# EAGLE board AS726x Spectral Sensor Panel-NoGaps (EAGLE 7.7.0), part 1 of 2
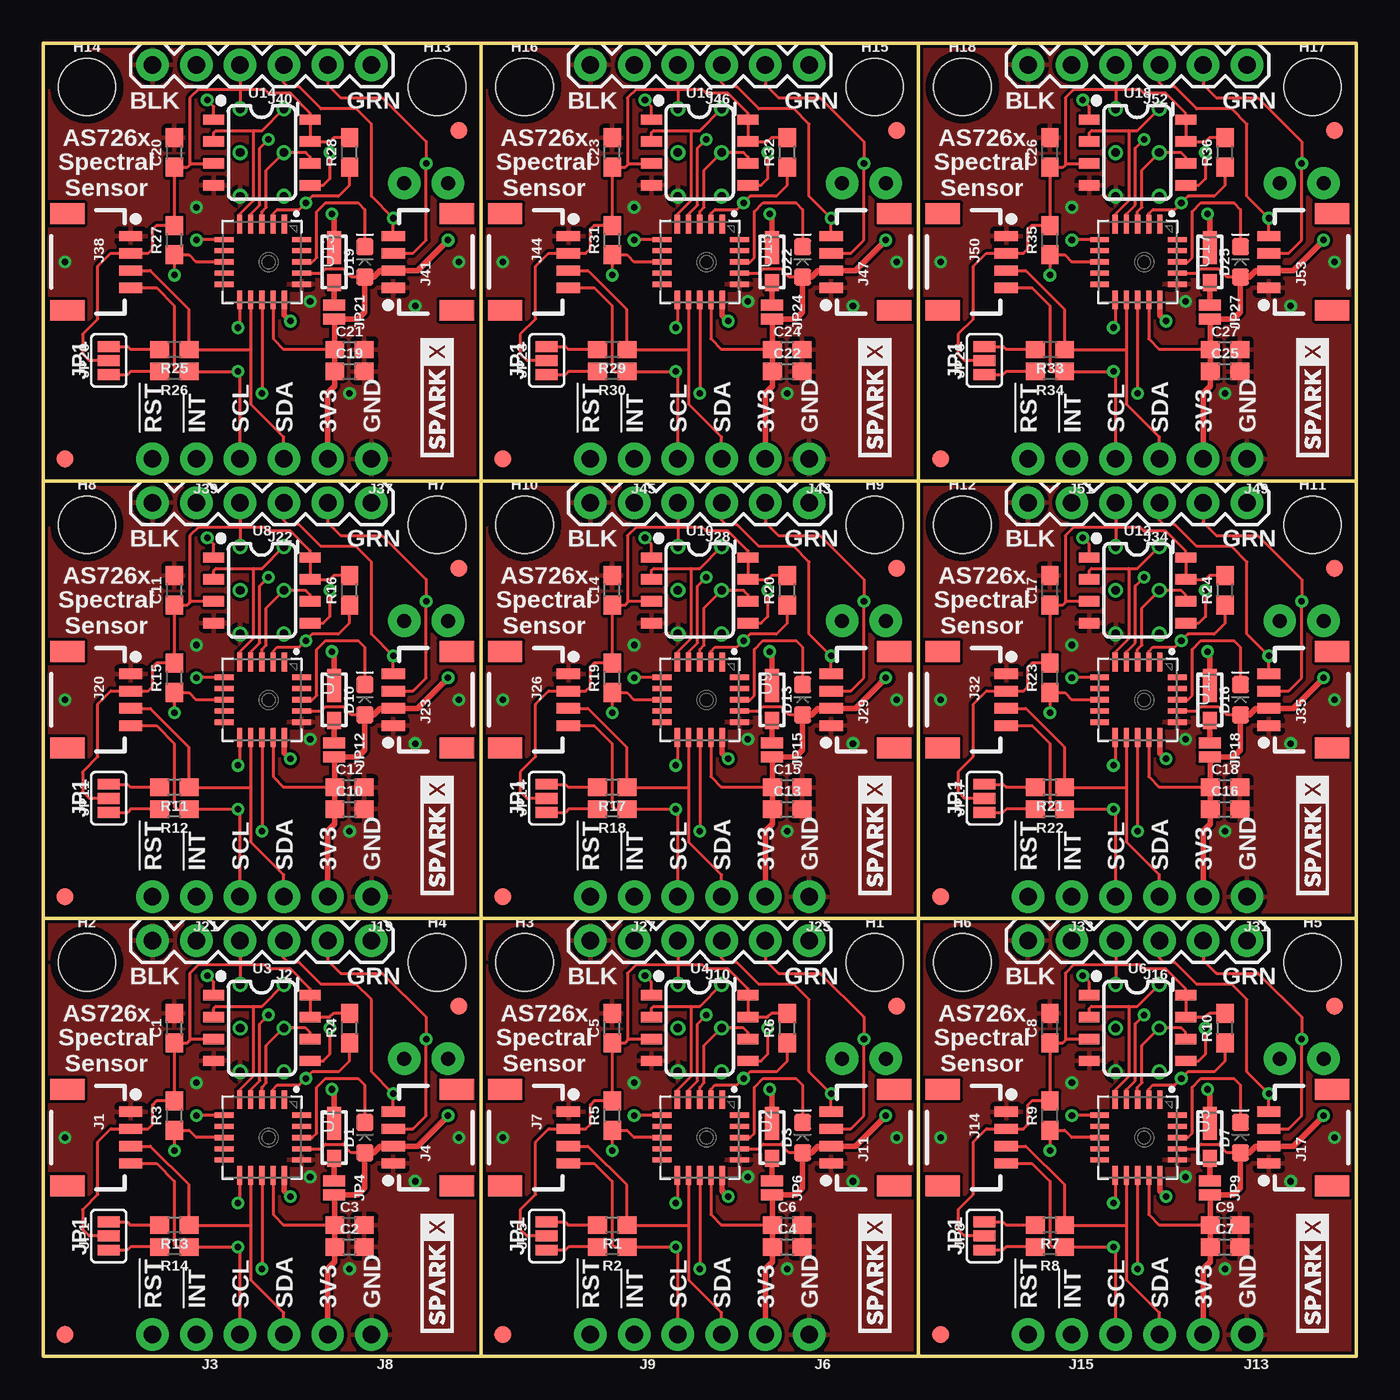
[diagram p0: board, top side]
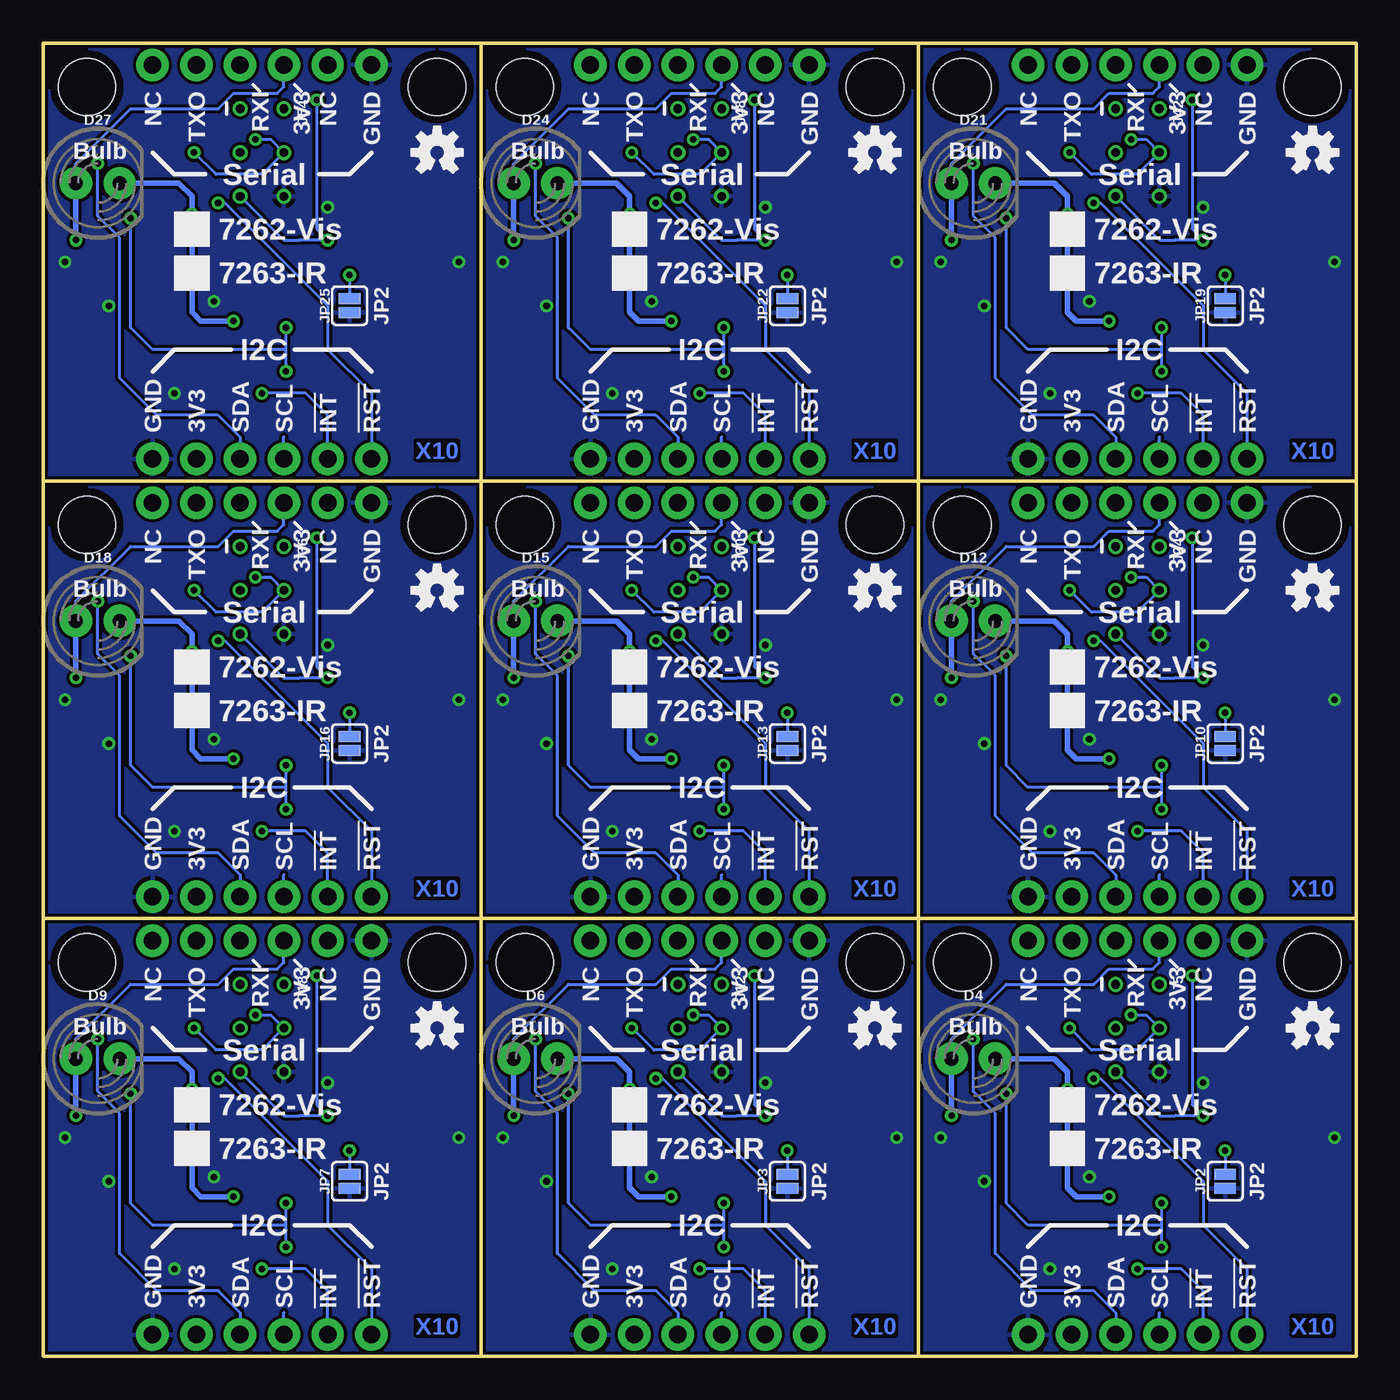
[diagram p1: board, bottom side, seen from below]

Size 76.2 x 76.2 mm. Coordinates in mm from the lower left corner, seen from the top.
Outline: 0,25.4 0,0 25.4,0
Outline: 0,25.4 25.4,25.4
Outline: 25.4,25.4 25.4,0
Outline: 25.4,0 25.4,25.4
Outline: 25.4,25.4 50.8,25.4
Outline: 50.8,25.4 50.8,0
Outline: 50.8,0 25.4,0
Outline: 50.8,0 50.8,25.4
Outline: 50.8,25.4 76.2,25.4
Outline: 76.2,25.4 76.2,0 50.8,0
Outline: 0,25.4 0,50.8
Outline: 0,50.8 25.4,50.8
Outline: 25.4,50.8 25.4,25.4
Outline: 25.4,25.4 0,25.4
Outline: 25.4,25.4 25.4,50.8
Outline: 25.4,50.8 50.8,50.8
Outline: 50.8,50.8 50.8,25.4
Outline: 50.8,25.4 25.4,25.4
Outline: 50.8,25.4 50.8,50.8
Outline: 50.8,50.8 76.2,50.8
Outline: 76.2,50.8 76.2,25.4
Outline: 76.2,25.4 50.8,25.4
Outline: 0,50.8 0,76.2 25.4,76.2
Outline: 25.4,76.2 25.4,50.8
Outline: 25.4,50.8 0,50.8
Outline: 25.4,50.8 25.4,76.2
Outline: 25.4,76.2 50.8,76.2
Outline: 50.8,76.2 50.8,50.8
Outline: 50.8,50.8 25.4,50.8
Outline: 50.8,50.8 50.8,76.2
Outline: 50.8,76.2 76.2,76.2 76.2,50.8
Outline: 76.2,50.8 50.8,50.8
Copper layers (1*16): Top 0.035mm / dielectric 1.5mm / Bottom 0.035mm
Design rules "SparkFun-2-layer-TIGHT": minimum track width 7mil, minimum drill 15mil, track to track 7mil, track to pad 7mil, pad to pad 7mil, via to via 7mil, smd to smd 7mil, copper to edge 7mil, drill to drill 7mil, minimum pad ring 7mil, minimum via ring 7mil, stop-mask expansion 4mil, vias tented up to drill 25mil, thermal gap 10mil

## Footprints (pad centres in the part's own frame; a part is rotated, then mirrored left to right if it is on the bottom)
0603 = smd 1.1 x 1: 1 -0.85,0; 2 0.85,0
LED-0603 = smd 1 x 1: A -0.877,0; C 0.877,0
SUPER_BRIGHT_SMD_LED_1206 = smd 1 x 0.8: A -1.2,0 | smd 1.9 x 0.8: C 0.827,0
LED_5MM_NOSILK = drill 0.813 pad 1.88: A -1.27,0; K 1.27,0
FIDUCIAL-1X2 = smd 1 x 1: 1 0,0
STAND-OFF = hole 3.302: 0,0
1X04_1MM_RA = smd 0.6 x 1.35: 1 -1.5,0; 2 -0.5,0; 3 0.5,0; 4 1.5,0 | smd 1.2 x 2: NC1 2.8,-3.675; NC2 -2.8,-3.675
FTDI_BASIC = drill 1.016 pad 1.88: CTS 10.16,0; DTR 0,0; GND 12.7,0; RXI 2.54,0; TXO 5.08,0; VCC 7.62,0
1X02_NO_SILK = drill 1.016 pad 1.88: 1 0,0; 2 2.54,0
2X3_TEST_POINTS = drill 0.508: 1 -2.54,-1.27; 2 -2.54,1.27; 3 0,-1.27; 4 0,1.27; 5 2.54,-1.27; 6 2.54,1.27
1X04_NO_SILK = drill 1.016 pad 1.88: 1 0,0; 2 2.54,0; 3 5.08,0; 4 7.62,0
SMT-JUMPER_3_2-NC_PASTE_SILK = smd 0.635 x 1.27: 1 -0.813,0; 2 0,0; 3 0.813,0
SMT-JUMPER_2_NO_SILK = smd 0.635 x 1.27: 1 -0.406,0; 2 0.406,0
SMT-JUMPER_2_NC_PASTE_NO-SILK = smd 0.635 x 1.27: 1 -0.406,0; 2 0.406,0
LGA20 = smd 1.1 x 0.3: 1 -2.2,1.3; 2 -2.2,0.65; 3 -2.2,0; 4 -2.2,-0.65; 5 -2.2,-1.3; 11 2.2,-1.3; 12 2.2,-0.65; 13 2.2,0; 14 2.2,0.65; 15 2.2,1.3 | smd 0.3 x 1.1: 6 -1.3,-2.2; 7 -0.65,-2.2; 8 0,-2.2; 9 0.65,-2.2; 10 1.3,-2.2; 16 1.3,2.3; 17 0.65,2.3; 18 0,2.3; 19 -0.65,2.3; 20 -1.3,2.3
SO08 = smd 0.6 x 1.2: 1 -1.905,-2.8; 2 -0.635,-2.8; 3 0.635,-2.8; 4 1.905,-2.8; 5 1.905,2.8; 6 0.635,2.8; 7 -0.635,2.8; 8 -1.905,2.8

## Placement (x,y rotation side)
C1  1.0uF  [0603]  7.62,19.05 90 top
C2  1.0uF  [0603]  17.78,6.35 0 top
C3  10uF  [0603]  17.78,7.62 0 top
C4  1.0uF  [0603]  43.18,6.35 0 top
C5  1.0uF  [0603]  33.02,19.05 90 top
C6  10uF  [0603]  43.18,7.62 0 top
C7  1.0uF  [0603]  68.58,6.35 0 top
C8  1.0uF  [0603]  58.42,19.05 90 top
C9  10uF  [0603]  68.58,7.62 0 top
C10  1.0uF  [0603]  17.78,31.75 0 top
C11  1.0uF  [0603]  7.62,44.45 90 top
C12  10uF  [0603]  17.78,33.02 0 top
C13  1.0uF  [0603]  43.18,31.75 0 top
C14  1.0uF  [0603]  33.02,44.45 90 top
C15  10uF  [0603]  43.18,33.02 0 top
C16  1.0uF  [0603]  68.58,31.75 0 top
C17  1.0uF  [0603]  58.42,44.45 90 top
C18  10uF  [0603]  68.58,33.02 0 top
C19  1.0uF  [0603]  17.78,57.15 0 top
C20  1.0uF  [0603]  7.62,69.85 90 top
C21  10uF  [0603]  17.78,58.42 0 top
C22  1.0uF  [0603]  43.18,57.15 0 top
C23  1.0uF  [0603]  33.02,69.85 90 top
C24  10uF  [0603]  43.18,58.42 0 top
C25  1.0uF  [0603]  68.58,57.15 0 top
C26  1.0uF  [0603]  58.42,69.85 90 top
C27  10uF  [0603]  68.58,58.42 0 top
D1  BLUE  [LED-0603]  18.67,12.7 90 top
D2  5700k  [SUPER_BRIGHT_SMD_LED_1206]  16.89,12.7 90 top
D3  BLUE  [LED-0603]  44.07,12.7 90 top
D4  Incandescent  [LED_5MM_NOSILK]  22.23,17.27 0 bottom
D5  5700k  [SUPER_BRIGHT_SMD_LED_1206]  42.29,12.7 90 top
D6  Incandescent  [LED_5MM_NOSILK]  47.62,17.27 0 bottom
D7  BLUE  [LED-0603]  69.47,12.7 90 top
D8  5700k  [SUPER_BRIGHT_SMD_LED_1206]  67.69,12.7 90 top
D9  Incandescent  [LED_5MM_NOSILK]  73.03,17.27 0 bottom
D10  BLUE  [LED-0603]  18.67,38.1 90 top
D11  5700k  [SUPER_BRIGHT_SMD_LED_1206]  16.89,38.1 90 top
D12  Incandescent  [LED_5MM_NOSILK]  22.23,42.67 0 bottom
D13  BLUE  [LED-0603]  44.07,38.1 90 top
D14  5700k  [SUPER_BRIGHT_SMD_LED_1206]  42.29,38.1 90 top
D15  Incandescent  [LED_5MM_NOSILK]  47.62,42.67 0 bottom
D16  BLUE  [LED-0603]  69.47,38.1 90 top
D17  5700k  [SUPER_BRIGHT_SMD_LED_1206]  67.69,38.1 90 top
D18  Incandescent  [LED_5MM_NOSILK]  73.03,42.67 0 bottom
D19  BLUE  [LED-0603]  18.67,63.5 90 top
D20  5700k  [SUPER_BRIGHT_SMD_LED_1206]  16.89,63.5 90 top
D21  Incandescent  [LED_5MM_NOSILK]  22.23,68.07 0 bottom
D22  BLUE  [LED-0603]  44.07,63.5 90 top
D23  5700k  [SUPER_BRIGHT_SMD_LED_1206]  42.29,63.5 90 top
D24  Incandescent  [LED_5MM_NOSILK]  47.62,68.07 0 bottom
D25  BLUE  [LED-0603]  69.47,63.5 90 top
D26  5700k  [SUPER_BRIGHT_SMD_LED_1206]  67.69,63.5 90 top
D27  Incandescent  [LED_5MM_NOSILK]  73.03,68.07 0 bottom
FD1  FIDUCIAL1X2  [FIDUCIAL-1X2]  1.27,1.27 0 top
FD2  FIDUCIAL1X2  [FIDUCIAL-1X2]  24.13,20.32 0 top
FD3  FIDUCIAL1X2  [FIDUCIAL-1X2]  26.67,1.27 0 top
FD4  FIDUCIAL1X2  [FIDUCIAL-1X2]  49.53,20.32 0 top
FD5  FIDUCIAL1X2  [FIDUCIAL-1X2]  52.07,1.27 0 top
FD6  FIDUCIAL1X2  [FIDUCIAL-1X2]  74.93,20.32 0 top
FD7  FIDUCIAL1X2  [FIDUCIAL-1X2]  1.27,26.67 0 top
FD8  FIDUCIAL1X2  [FIDUCIAL-1X2]  24.13,45.72 0 top
FD9  FIDUCIAL1X2  [FIDUCIAL-1X2]  26.67,26.67 0 top
FD10  FIDUCIAL1X2  [FIDUCIAL-1X2]  49.53,45.72 0 top
FD11  FIDUCIAL1X2  [FIDUCIAL-1X2]  52.07,26.67 0 top
FD12  FIDUCIAL1X2  [FIDUCIAL-1X2]  74.93,45.72 0 top
FD13  FIDUCIAL1X2  [FIDUCIAL-1X2]  1.27,52.07 0 top
FD14  FIDUCIAL1X2  [FIDUCIAL-1X2]  24.13,71.12 0 top
FD15  FIDUCIAL1X2  [FIDUCIAL-1X2]  26.67,52.07 0 top
FD16  FIDUCIAL1X2  [FIDUCIAL-1X2]  49.53,71.12 0 top
FD17  FIDUCIAL1X2  [FIDUCIAL-1X2]  52.07,52.07 0 top
FD18  FIDUCIAL1X2  [FIDUCIAL-1X2]  74.93,71.12 0 top
H1  STAND-OFF  [STAND-OFF]  48.26,22.86 0 top
H2  STAND-OFF  [STAND-OFF]  2.54,22.86 0 top
H3  STAND-OFF  [STAND-OFF]  27.94,22.86 0 top
H4  STAND-OFF  [STAND-OFF]  22.86,22.86 0 top
H5  STAND-OFF  [STAND-OFF]  73.66,22.86 0 top
H6  STAND-OFF  [STAND-OFF]  53.34,22.86 0 top
H7  STAND-OFF  [STAND-OFF]  22.86,48.26 0 top
H8  STAND-OFF  [STAND-OFF]  2.54,48.26 0 top
H9  STAND-OFF  [STAND-OFF]  48.26,48.26 0 top
H10  STAND-OFF  [STAND-OFF]  27.94,48.26 0 top
H11  STAND-OFF  [STAND-OFF]  73.66,48.26 0 top
H12  STAND-OFF  [STAND-OFF]  53.34,48.26 0 top
H13  STAND-OFF  [STAND-OFF]  22.86,73.66 0 top
H14  STAND-OFF  [STAND-OFF]  2.54,73.66 0 top
H15  STAND-OFF  [STAND-OFF]  48.26,73.66 0 top
H16  STAND-OFF  [STAND-OFF]  27.94,73.66 0 top
H17  STAND-OFF  [STAND-OFF]  73.66,73.66 0 top
H18  STAND-OFF  [STAND-OFF]  53.34,73.66 0 top
J1  [1X04_1MM_RA]  5.08,12.7 270 top
J2  Serial Interface  [FTDI_BASIC]  19.05,24.13 180 top
J3  [1X02_NO_SILK]  8.89,1.27 180 top
J4  [1X04_1MM_RA]  20.32,12.7 90 top
J5  Flash Programming  [2X3_TEST_POINTS]  12.7,19.05 270 bottom
J6  [1X04_NO_SILK]  44.45,1.27 180 top
J7  [1X04_1MM_RA]  30.48,12.7 270 top
J8  [1X04_NO_SILK]  19.05,1.27 180 top
J9  [1X02_NO_SILK]  34.29,1.27 180 top
J10  Serial Interface  [FTDI_BASIC]  44.45,24.13 180 top
J11  [1X04_1MM_RA]  45.72,12.7 90 top
J12  Flash Programming  [2X3_TEST_POINTS]  38.1,19.05 270 bottom
J13  [1X04_NO_SILK]  69.85,1.27 180 top
J14  [1X04_1MM_RA]  55.88,12.7 270 top
J15  [1X02_NO_SILK]  59.69,1.27 180 top
J16  Serial Interface  [FTDI_BASIC]  69.85,24.13 180 top
J17  [1X04_1MM_RA]  71.12,12.7 90 top
J18  Flash Programming  [2X3_TEST_POINTS]  63.5,19.05 270 bottom
J19  [1X04_NO_SILK]  19.05,26.67 180 top
J20  [1X04_1MM_RA]  5.08,38.1 270 top
J21  [1X02_NO_SILK]  8.89,26.67 180 top
J22  Serial Interface  [FTDI_BASIC]  19.05,49.53 180 top
J23  [1X04_1MM_RA]  20.32,38.1 90 top
J24  Flash Programming  [2X3_TEST_POINTS]  12.7,44.45 270 bottom
J25  [1X04_NO_SILK]  44.45,26.67 180 top
J26  [1X04_1MM_RA]  30.48,38.1 270 top
J27  [1X02_NO_SILK]  34.29,26.67 180 top
J28  Serial Interface  [FTDI_BASIC]  44.45,49.53 180 top
J29  [1X04_1MM_RA]  45.72,38.1 90 top
J30  Flash Programming  [2X3_TEST_POINTS]  38.1,44.45 270 bottom
J31  [1X04_NO_SILK]  69.85,26.67 180 top
J32  [1X04_1MM_RA]  55.88,38.1 270 top
J33  [1X02_NO_SILK]  59.69,26.67 180 top
J34  Serial Interface  [FTDI_BASIC]  69.85,49.53 180 top
J35  [1X04_1MM_RA]  71.12,38.1 90 top
J36  Flash Programming  [2X3_TEST_POINTS]  63.5,44.45 270 bottom
J37  [1X04_NO_SILK]  19.05,52.07 180 top
J38  [1X04_1MM_RA]  5.08,63.5 270 top
J39  [1X02_NO_SILK]  8.89,52.07 180 top
J40  Serial Interface  [FTDI_BASIC]  19.05,74.93 180 top
J41  [1X04_1MM_RA]  20.32,63.5 90 top
J42  Flash Programming  [2X3_TEST_POINTS]  12.7,69.85 270 bottom
J43  [1X04_NO_SILK]  44.45,52.07 180 top
J44  [1X04_1MM_RA]  30.48,63.5 270 top
J45  [1X02_NO_SILK]  34.29,52.07 180 top
J46  Serial Interface  [FTDI_BASIC]  44.45,74.93 180 top
J47  [1X04_1MM_RA]  45.72,63.5 90 top
J48  Flash Programming  [2X3_TEST_POINTS]  38.1,69.85 270 bottom
J49  [1X04_NO_SILK]  69.85,52.07 180 top
J50  [1X04_1MM_RA]  55.88,63.5 270 top
J51  [1X02_NO_SILK]  59.69,52.07 180 top
J52  Serial Interface  [FTDI_BASIC]  69.85,74.93 180 top
J53  [1X04_1MM_RA]  71.12,63.5 90 top
J54  Flash Programming  [2X3_TEST_POINTS]  63.5,69.85 270 bottom
JP1  [SMT-JUMPER_3_2-NC_PASTE_SILK]  3.81,6.99 90 top
JP2  [SMT-JUMPER_2_NO_SILK]  7.62,10.16 90 bottom
JP3  [SMT-JUMPER_2_NO_SILK]  33.02,10.16 90 bottom
JP4  [SMT-JUMPER_2_NC_PASTE_NO-SILK]  16.89,9.78 270 top
JP5  [SMT-JUMPER_3_2-NC_PASTE_SILK]  29.21,6.99 90 top
JP6  [SMT-JUMPER_2_NC_PASTE_NO-SILK]  42.29,9.78 270 top
JP7  [SMT-JUMPER_2_NO_SILK]  58.42,10.16 90 bottom
JP8  [SMT-JUMPER_3_2-NC_PASTE_SILK]  54.61,6.99 90 top
JP9  [SMT-JUMPER_2_NC_PASTE_NO-SILK]  67.69,9.78 270 top
JP10  [SMT-JUMPER_2_NO_SILK]  7.62,35.56 90 bottom
JP11  [SMT-JUMPER_3_2-NC_PASTE_SILK]  3.81,32.38 90 top
JP12  [SMT-JUMPER_2_NC_PASTE_NO-SILK]  16.89,35.18 270 top
JP13  [SMT-JUMPER_2_NO_SILK]  33.02,35.56 90 bottom
JP14  [SMT-JUMPER_3_2-NC_PASTE_SILK]  29.21,32.38 90 top
JP15  [SMT-JUMPER_2_NC_PASTE_NO-SILK]  42.29,35.18 270 top
JP16  [SMT-JUMPER_2_NO_SILK]  58.42,35.56 90 bottom
JP17  [SMT-JUMPER_3_2-NC_PASTE_SILK]  54.61,32.38 90 top
JP18  [SMT-JUMPER_2_NC_PASTE_NO-SILK]  67.69,35.18 270 top
JP19  [SMT-JUMPER_2_NO_SILK]  7.62,60.96 90 bottom
JP20  [SMT-JUMPER_3_2-NC_PASTE_SILK]  3.81,57.78 90 top
JP21  [SMT-JUMPER_2_NC_PASTE_NO-SILK]  16.89,60.58 270 top
JP22  [SMT-JUMPER_2_NO_SILK]  33.02,60.96 90 bottom
JP23  [SMT-JUMPER_3_2-NC_PASTE_SILK]  29.21,57.78 90 top
JP24  [SMT-JUMPER_2_NC_PASTE_NO-SILK]  42.29,60.58 270 top
JP25  [SMT-JUMPER_2_NO_SILK]  58.42,60.96 90 bottom
JP26  [SMT-JUMPER_3_2-NC_PASTE_SILK]  54.61,57.78 90 top
JP27  [SMT-JUMPER_2_NC_PASTE_NO-SILK]  67.69,60.58 270 top
LOGO1  OSHW-LOGOS  [OSHW-LOGO-S]  27.94,19.05 0 bottom
LOGO2  OSHW-LOGOS  [OSHW-LOGO-S]  53.34,19.05 0 bottom
LOGO3  OSHW-LOGOS  [OSHW-LOGO-S]  2.54,44.45 0 bottom
LOGO4  OSHW-LOGOS  [OSHW-LOGO-S]  2.54,19.05 0 bottom
LOGO5  OSHW-LOGOS  [OSHW-LOGO-S]  27.94,44.45 0 bottom
LOGO6  OSHW-LOGOS  [OSHW-LOGO-S]  53.34,44.45 0 bottom
LOGO7  OSHW-LOGOS  [OSHW-LOGO-S]  2.54,69.85 0 bottom
LOGO8  OSHW-LOGOS  [OSHW-LOGO-S]  27.94,69.85 0 bottom
LOGO9  OSHW-LOGOS  [OSHW-LOGO-S]  53.34,69.85 0 bottom
R1  4.7k  [0603]  33.02,7.62 180 top
R2  4.7k  [0603]  33.02,6.35 180 top
R3  10k  [0603]  7.62,13.97 90 top
R4  10k  [0603]  17.78,19.05 90 top
R5  10k  [0603]  33.02,13.97 90 top
R6  10k  [0603]  43.18,19.05 90 top
R7  4.7k  [0603]  58.42,7.62 180 top
R8  4.7k  [0603]  58.42,6.35 180 top
R9  10k  [0603]  58.42,13.97 90 top
R10  10k  [0603]  68.58,19.05 90 top
R11  4.7k  [0603]  7.62,33.02 180 top
R12  4.7k  [0603]  7.62,31.75 180 top
R13  4.7k  [0603]  7.62,7.62 180 top
R14  4.7k  [0603]  7.62,6.35 180 top
R15  10k  [0603]  7.62,39.37 90 top
R16  10k  [0603]  17.78,44.45 90 top
R17  4.7k  [0603]  33.02,33.02 180 top
R18  4.7k  [0603]  33.02,31.75 180 top
R19  10k  [0603]  33.02,39.37 90 top
R20  10k  [0603]  43.18,44.45 90 top
R21  4.7k  [0603]  58.42,33.02 180 top
R22  4.7k  [0603]  58.42,31.75 180 top
R23  10k  [0603]  58.42,39.37 90 top
R24  10k  [0603]  68.58,44.45 90 top
R25  4.7k  [0603]  7.62,58.42 180 top
R26  4.7k  [0603]  7.62,57.15 180 top
R27  10k  [0603]  7.62,64.77 90 top
R28  10k  [0603]  17.78,69.85 90 top
R29  4.7k  [0603]  33.02,58.42 180 top
R30  4.7k  [0603]  33.02,57.15 180 top
R31  10k  [0603]  33.02,64.77 90 top
R32  10k  [0603]  43.18,69.85 90 top
R33  4.7k  [0603]  58.42,58.42 180 top
R34  4.7k  [0603]  58.42,57.15 180 top
R35  10k  [0603]  58.42,64.77 90 top
R36  10k  [0603]  68.58,69.85 90 top
U1  AS726X  [LGA20]  12.7,12.7 270 top
U2  AS726X  [LGA20]  38.1,12.7 270 top
U3  4MB Flash  [SO08]  12.7,19.05 270 top
U4  4MB Flash  [SO08]  38.1,19.05 270 top
U5  AS726X  [LGA20]  63.5,12.7 270 top
U6  4MB Flash  [SO08]  63.5,19.05 270 top
U7  AS726X  [LGA20]  12.7,38.1 270 top
U8  4MB Flash  [SO08]  12.7,44.45 270 top
U9  AS726X  [LGA20]  38.1,38.1 270 top
U10  4MB Flash  [SO08]  38.1,44.45 270 top
U11  AS726X  [LGA20]  63.5,38.1 270 top
U12  4MB Flash  [SO08]  63.5,44.45 270 top
U13  AS726X  [LGA20]  12.7,63.5 270 top
U14  4MB Flash  [SO08]  12.7,69.85 270 top
U15  AS726X  [LGA20]  38.1,63.5 270 top
U16  4MB Flash  [SO08]  38.1,69.85 270 top
U17  AS726X  [LGA20]  63.5,63.5 270 top
U18  4MB Flash  [SO08]  63.5,69.85 270 top
U$1  SPARKX-LOGO3  [SPARKX-SMALL]  22.86,4.83 90 top
U$2  SPARKX-LOGO3  [SPARKX-SMALL]  48.26,4.83 90 top
U$3  SPARKX-LOGO3  [SPARKX-SMALL]  73.66,4.83 90 top
U$4  SPARKX-LOGO3  [SPARKX-SMALL]  22.86,30.23 90 top
U$5  SPARKX-LOGO3  [SPARKX-SMALL]  48.26,30.23 90 top
U$6  SPARKX-LOGO3  [SPARKX-SMALL]  73.66,30.23 90 top
U$7  SPARKX-LOGO3  [SPARKX-SMALL]  22.86,55.63 90 top
U$8  SPARKX-LOGO3  [SPARKX-SMALL]  48.26,55.63 90 top
U$9  SPARKX-LOGO3  [SPARKX-SMALL]  73.66,55.63 90 top

## Library data of the parts
C1 C2 C4 C5 C7 C8 C10 C11 C13 C14 C16 C17 C19 C20 C22 C23 C25 C26 = SparkFun-Capacitors; PROD_ID: CAP-00868
C3 C6 C9 C12 C15 C18 C21 C24 C27 = SparkFun-Capacitors; PROD_ID: CAP-11015
D1 D3 D7 D10 D13 D16 D19 D22 D25 = SparkFun-LED; PROD_ID: DIO-08575
D2 D4-D6 D8 D9 D11 D12 D14 D15 D17 D18 D20 D21 D23 D24 D26 D27 J1 J4 J7 J11 J14 J17 J20 J23 J26 J29 J32 J35 J38 J41 J44 J47 J50 J53 U1 U2 U5 U7 U9 U11 U13 U15 U17 U$1-U$9 = SparkX
FD1-FD18 LOGO1-LOGO9 = SparkFun-Aesthetics
H1-H18 = SparkFun-Hardware
J2 J3 J5 J6 J8-J10 J12 J13 J15 J16 J18 J19 J21 J22 J24 J25 J27 J28 J30 J31 J33 J34 J36 J37 J39 J40 J42 J43 J45 J46 J48 J49 J51 J52 J54 = SparkFun-Connectors
JP1-JP27 = SparkFun-Jumpers
R1 R2 R7 R8 R11-R14 R17 R18 R21 R22 R25 R26 R29 R30 R33 R34 = SparkFun-Resistors; PROD_ID: RES-07857
R3-R6 R9 R10 R15 R16 R19 R20 R23 R24 R27 R28 R31 R32 R35 R36 = SparkFun-Resistors; PROD_ID: RES-00824
U3 U4 U6 U8 U10 U12 U14 U16 U18 = SparkFun-IC-Memory; PROD_ID: IC-12455

## Nets
3.3V: C1.1 C2.1 C3.1 D1.A D4.A J1.2 J2.VCC J4.2 J5.2 J8.2 JP1.2 JP4.2 R3.2 R4.2 U1.14 U1.17 U3.3 U3.7 U3.8
3.3V1: C4.1 C5.1 C6.1 D3.A D6.A J6.2 J7.2 J10.VCC J11.2 J12.2 JP5.2 JP6.2 R5.2 R6.2 U2.14 U2.17 U4.3 U4.7 U4.8
3.3V2: C7.1 C8.1 C9.1 D7.A D9.A J13.2 J14.2 J16.VCC J17.2 J18.2 JP8.2 JP9.2 R9.2 R10.2 U5.14 U5.17 U6.3 U6.7 U6.8
3.3V3: C10.1 C11.1 C12.1 D10.A D12.A J19.2 J20.2 J22.VCC J23.2 J24.2 JP11.2 JP12.2 R15.2 R16.2 U7.14 U7.17 U8.3 U8.7 U8.8
3.3V4: C13.1 C14.1 C15.1 D13.A D15.A J25.2 J26.2 J28.VCC J29.2 J30.2 JP14.2 JP15.2 R19.2 R20.2 U9.14 U9.17 U10.3 U10.7 U10.8
3.3V5: C16.1 C17.1 C18.1 D16.A D18.A J31.2 J32.2 J34.VCC J35.2 J36.2 JP17.2 JP18.2 R23.2 R24.2 U11.14 U11.17 U12.3 U12.7 U12.8
3.3V6: C19.1 C20.1 C21.1 D19.A D21.A J37.2 J38.2 J40.VCC J41.2 J42.2 JP20.2 JP21.2 R27.2 R28.2 U13.14 U13.17 U14.3 U14.7 U14.8
3.3V7: C22.1 C23.1 C24.1 D22.A D24.A J43.2 J44.2 J46.VCC J47.2 J48.2 JP23.2 JP24.2 R31.2 R32.2 U15.14 U15.17 U16.3 U16.7 U16.8
3.3V8: C25.1 C26.1 C27.1 D25.A D27.A J49.2 J50.2 J52.VCC J53.2 J54.2 JP26.2 JP27.2 R35.2 R36.2 U17.14 U17.17 U18.3 U18.7 U18.8
!CS_EE: J5.5 U1.6 U3.1
!CS_EE1: J12.5 U2.6 U4.1
!CS_EE2: J18.5 U5.6 U6.1
!CS_EE3: J24.5 U7.6 U8.1
!CS_EE4: J30.5 U9.6 U10.1
!CS_EE5: J36.5 U11.6 U12.1
!CS_EE6: J42.5 U13.6 U14.1
!CS_EE7: J48.5 U15.6 U16.1
!CS_EE8: J54.5 U17.6 U18.1
!INT: J3.1 U1.13
!INT1: J9.1 U2.13
!INT2: J15.1 U5.13
!INT3: J21.1 U7.13
!INT4: J27.1 U9.13
!INT5: J33.1 U11.13
!INT6: J39.1 U13.13
!INT7: J45.1 U15.13
!INT8: J51.1 U17.13
!RST: J3.2 R4.1 U1.2
!RST1: J9.2 R6.1 U2.2
!RST2: J15.2 R10.1 U5.2
!RST3: J21.2 R16.1 U7.2
!RST4: J27.2 R20.1 U9.2
!RST5: J33.2 R24.1 U11.2
!RST6: J39.2 R28.1 U13.2
!RST7: J45.2 R32.1 U15.2
!RST8: J51.2 R36.1 U17.2
GND: C1.2 C2.2 C3.2 J1.1 J2.GND J4.1 J5.6 J8.1 JP2.1 U1.16 U3.4
GND1: C4.2 C5.2 C6.2 J6.1 J7.1 J10.GND J11.1 J12.6 JP3.1 U2.16 U4.4
GND2: C7.2 C8.2 C9.2 J13.1 J14.1 J16.GND J17.1 J18.6 JP7.1 U5.16 U6.4
GND3: C10.2 C11.2 C12.2 J19.1 J20.1 J22.GND J23.1 J24.6 JP10.1 U7.16 U8.4
GND4: C13.2 C14.2 C15.2 J25.1 J26.1 J28.GND J29.1 J30.6 JP13.1 U9.16 U10.4
GND5: C16.2 C17.2 C18.2 J31.1 J32.1 J34.GND J35.1 J36.6 JP16.1 U11.16 U12.4
GND6: C19.2 C20.2 C21.2 J37.1 J38.1 J40.GND J41.1 J42.6 JP19.1 U13.16 U14.4
GND7: C22.2 C23.2 C24.2 J43.1 J44.1 J46.GND J47.1 J48.6 JP22.1 U15.16 U16.4
GND8: C25.2 C26.2 C27.2 J49.1 J50.1 J52.GND J53.1 J54.6 JP25.1 U17.16 U18.4
LED_DRV: D2.C D4.K U1.15
LED_DRV1: D5.C D6.K U2.15
LED_DRV2: D8.C D9.K U5.15
LED_DRV3: D11.C D12.K U7.15
LED_DRV4: D14.C D15.K U9.15
LED_DRV5: D17.C D18.K U11.15
LED_DRV6: D20.C D21.K U13.15
LED_DRV7: D23.C D24.K U15.15
LED_DRV8: D26.C D27.K U17.15
MISO: J5.1 U1.5 U3.2
MISO1: J12.1 U2.5 U4.2
MISO2: J18.1 U5.5 U6.2
MISO3: J24.1 U7.5 U8.2
MISO4: J30.1 U9.5 U10.2
MISO5: J36.1 U11.5 U12.2
MISO6: J42.1 U13.5 U14.2
MISO7: J48.1 U15.5 U16.2
MISO8: J54.1 U17.5 U18.2
MOSI: J5.4 U1.4 U3.5
MOSI1: J12.4 U2.4 U4.5
MOSI2: J18.4 U5.4 U6.5
MOSI3: J24.4 U7.4 U8.5
MOSI4: J30.4 U9.4 U10.5
MOSI5: J36.4 U11.4 U12.5
MOSI6: J42.4 U13.4 U14.5
MOSI7: J48.4 U15.4 U16.5
MOSI8: J54.4 U17.4 U18.5
N$1: JP2.2 R3.1 U1.8
N$2: D1.C U1.18
N$3: JP5.3 R1.2
N$4: JP1.3 R13.2
N$5: JP1.1 R14.2
N$6: D2.A JP4.1
N$7: JP5.1 R2.2
N$8: JP3.2 R5.1 U2.8
N$9: D3.C U2.18
N$10: D5.A JP6.1
N$11: JP8.3 R7.2
N$12: JP8.1 R8.2
N$13: JP7.2 R9.1 U5.8
N$14: D7.C U5.18
N$15: D8.A JP9.1
N$16: JP11.3 R11.2
N$17: JP11.1 R12.2
N$18: JP10.2 R15.1 U7.8
N$19: D10.C U7.18
N$20: D11.A JP12.1
N$21: JP14.3 R17.2
N$22: JP14.1 R18.2
N$23: JP13.2 R19.1 U9.8
N$24: D13.C U9.18
N$25: D14.A JP15.1
N$26: JP17.3 R21.2
N$27: JP17.1 R22.2
N$28: JP16.2 R23.1 U11.8
N$29: D16.C U11.18
N$30: D17.A JP18.1
N$31: JP20.3 R25.2
N$32: JP20.1 R26.2
N$33: JP19.2 R27.1 U13.8
N$34: D19.C U13.18
N$35: D20.A JP21.1
N$36: JP23.3 R29.2
N$37: JP23.1 R30.2
N$38: JP22.2 R31.1 U15.8
N$39: D22.C U15.18
N$40: D23.A JP24.1
N$41: JP26.3 R33.2
N$42: JP26.1 R34.2
N$43: JP25.2 R35.1 U17.8
N$44: D25.C U17.18
N$45: D26.A JP27.1
RX/SCL: J1.4 J2.TXO J4.4 J8.4 R14.1 U1.11
RX/SCL1: J6.4 J7.4 J10.TXO J11.4 R2.1 U2.11
RX/SCL2: J13.4 J14.4 J16.TXO J17.4 R8.1 U5.11
RX/SCL3: J19.4 J20.4 J22.TXO J23.4 R12.1 U7.11
RX/SCL4: J25.4 J26.4 J28.TXO J29.4 R18.1 U9.11
RX/SCL5: J31.4 J32.4 J34.TXO J35.4 R22.1 U11.11
RX/SCL6: J37.4 J38.4 J40.TXO J41.4 R26.1 U13.11
RX/SCL7: J43.4 J44.4 J46.TXO J47.4 R30.1 U15.11
RX/SCL8: J49.4 J50.4 J52.TXO J53.4 R34.1 U17.11
SCK: J5.3 U1.3 U3.6
SCK1: J12.3 U2.3 U4.6
SCK2: J18.3 U5.3 U6.6
SCK3: J24.3 U7.3 U8.6
SCK4: J30.3 U9.3 U10.6
SCK5: J36.3 U11.3 U12.6
SCK6: J42.3 U13.3 U14.6
SCK7: J48.3 U15.3 U16.6
SCK8: J54.3 U17.3 U18.6
TX/SDA: J1.3 J2.RXI J4.3 J8.3 R13.1 U1.12
TX/SDA1: J6.3 J7.3 J10.RXI J11.3 R1.1 U2.12
TX/SDA2: J13.3 J14.3 J16.RXI J17.3 R7.1 U5.12
TX/SDA3: J19.3 J20.3 J22.RXI J23.3 R11.1 U7.12
TX/SDA4: J25.3 J26.3 J28.RXI J29.3 R17.1 U9.12
TX/SDA5: J31.3 J32.3 J34.RXI J35.3 R21.1 U11.12
TX/SDA6: J37.3 J38.3 J40.RXI J41.3 R25.1 U13.12
TX/SDA7: J43.3 J44.3 J46.RXI J47.3 R29.1 U15.12
TX/SDA8: J49.3 J50.3 J52.RXI J53.3 R33.1 U17.12

## Tracks (layer width: path | path; a pad name or v marks a point on that pad's centre or on a via)
3.3V  (via drill 0.38)
  Top 0.178: C3.1 13.97,7.62 13.35,8.24 U1.14 | U3.3 8.6,18.41 8.51,18.33 | R4.2 16.85,19.9 16.64,19.68 U3.7 U3.8 15.5,21.33 14.35,22.48 13.08,22.48 12.83,22.73 11.43,22.73 | 8.51,18.33 8.51,22.23 9.02,22.73 11.43,22.73 | 8.51,18.33 8.38,18.2 C1.1 R3.2 6.57,14.82 6.35,14.61 6.35,13.46 6.09,13.2 J1.2 3.94,13.21 3.17,12.45 3.17,9.4 2.29,8.51 2.29,7.37 2.67,6.99 JP1.2 | J2.VCC 11.43,22.73 | 11.43,22.73 J5.2 | J4.2 | U1.17 16.13,12.05 16.38,12.31 17.4,12.31 17.88,11.82 D1.A
  Top 0.305: J8.2 16.51,5.08 16.93,5.5 C2.1 C3.1 16.93,9.33 JP4.2 18.26,9.37 18.67,9.78 D1.A 19.19,11.82 19.57,12.2 J4.2 21.73,12.2 v23.5,13.97
  Bottom 0.178: D4.A 23.5,18.41 20.32,21.59 15.24,21.59 14.35,22.48 11.81,22.48 11.43,22.86 J2.VCC
  Bottom 0.305: v23.5,13.97 D4.A
3.3V1  (via drill 0.38)
  Top 0.178: C6.1 39.37,7.62 38.75,8.24 U2.14 | U4.3 34,18.41 33.91,18.33 | R6.2 42.25,19.9 42.04,19.68 U4.7 U4.8 40.9,21.33 39.75,22.48 38.48,22.48 38.23,22.73 36.83,22.73 | 33.91,18.33 33.91,22.23 34.42,22.73 36.83,22.73 | 33.91,18.33 33.78,18.2 C5.1 R5.2 31.96,14.82 31.75,14.61 31.75,13.46 31.49,13.2 J7.2 29.34,13.21 28.57,12.45 28.57,9.4 27.69,8.51 27.69,7.37 28.07,6.99 JP5.2 | J10.VCC 36.83,22.73 | 36.83,22.73 J12.2 | J11.2 | U2.17 41.53,12.05 41.78,12.31 42.8,12.31 43.28,11.82 D3.A
  Top 0.305: J6.2 41.91,5.08 42.33,5.5 C4.1 C6.1 42.33,9.33 JP6.2 43.66,9.37 44.07,9.78 D3.A 44.59,11.82 44.97,12.2 J11.2 47.12,12.2 v48.9,13.97
  Bottom 0.178: D6.A 48.9,18.41 45.72,21.59 40.64,21.59 39.75,22.48 37.21,22.48 36.83,22.86 J10.VCC
  Bottom 0.305: v48.9,13.97 D6.A
3.3V2  (via drill 0.38)
  Top 0.178: C9.1 64.77,7.62 64.15,8.24 U5.14 | U6.3 59.4,18.41 59.31,18.33 | R10.2 67.65,19.9 67.44,19.68 U6.7 U6.8 66.3,21.33 65.15,22.48 63.88,22.48 63.63,22.73 62.23,22.73 | 59.31,18.33 59.31,22.23 59.82,22.73 62.23,22.73 | 59.31,18.33 59.18,18.2 C8.1 R9.2 57.37,14.82 57.15,14.61 57.15,13.46 56.89,13.2 J14.2 54.74,13.21 53.98,12.45 53.98,9.4 53.09,8.51 53.09,7.37 53.47,6.99 JP8.2 | J16.VCC 62.23,22.73 | 62.23,22.73 J18.2 | J17.2 | U5.17 66.93,12.05 67.18,12.31 68.2,12.31 68.68,11.82 D7.A
  Top 0.305: J13.2 67.31,5.08 67.73,5.5 C7.1 C9.1 67.73,9.33 JP9.2 69.06,9.37 69.47,9.78 D7.A 69.99,11.82 70.37,12.2 J17.2 72.53,12.2 v74.3,13.97
  Bottom 0.178: D9.A 74.3,18.41 71.12,21.59 66.04,21.59 65.15,22.48 62.61,22.48 62.23,22.86 J16.VCC
  Bottom 0.305: v74.3,13.97 D9.A
3.3V3  (via drill 0.38)
  Top 0.178: C12.1 13.97,33.02 13.35,33.64 U7.14 | U8.3 8.6,43.81 8.51,43.73 | R16.2 16.85,45.3 16.64,45.09 U8.7 U8.8 15.5,46.73 14.35,47.88 13.08,47.88 12.83,48.13 11.43,48.13 | 8.51,43.73 8.51,47.62 9.02,48.13 11.43,48.13 | 8.51,43.73 8.38,43.6 C11.1 R15.2 6.57,40.22 6.35,40.01 6.35,38.86 6.09,38.6 J20.2 3.94,38.61 3.17,37.85 3.17,34.8 2.29,33.91 2.29,32.77 2.67,32.38 JP11.2 | J22.VCC 11.43,48.13 | 11.43,48.13 J24.2 | J23.2 | U7.17 16.13,37.45 16.38,37.71 17.4,37.71 17.88,37.22 D10.A
  Top 0.305: J19.2 16.51,30.48 16.93,30.9 C10.1 C12.1 16.93,34.73 JP12.2 18.26,34.77 18.67,35.18 D10.A 19.19,37.22 19.57,37.6 J23.2 21.73,37.6 v23.5,39.37
  Bottom 0.178: D12.A 23.5,43.81 20.32,46.99 15.24,46.99 14.35,47.88 11.81,47.88 11.43,48.26 J22.VCC
  Bottom 0.305: v23.5,39.37 D12.A
3.3V4  (via drill 0.38)
  Top 0.178: C15.1 39.37,33.02 38.75,33.64 U9.14 | U10.3 34,43.81 33.91,43.73 | R20.2 42.25,45.3 42.04,45.09 U10.7 U10.8 40.9,46.73 39.75,47.88 38.48,47.88 38.23,48.13 36.83,48.13 | 33.91,43.73 33.91,47.62 34.42,48.13 36.83,48.13 | 33.91,43.73 33.78,43.6 C14.1 R19.2 31.96,40.22 31.75,40.01 31.75,38.86 31.49,38.6 J26.2 29.34,38.61 28.57,37.85 28.57,34.8 27.69,33.91 27.69,32.77 28.07,32.38 JP14.2 | J28.VCC 36.83,48.13 | 36.83,48.13 J30.2 | J29.2 | U9.17 41.53,37.45 41.78,37.71 42.8,37.71 43.28,37.22 D13.A
  Top 0.305: J25.2 41.91,30.48 42.33,30.9 C13.1 C15.1 42.33,34.73 JP15.2 43.66,34.77 44.07,35.18 D13.A 44.59,37.22 44.97,37.6 J29.2 47.12,37.6 v48.9,39.37
  Bottom 0.178: D15.A 48.9,43.81 45.72,46.99 40.64,46.99 39.75,47.88 37.21,47.88 36.83,48.26 J28.VCC
  Bottom 0.305: v48.9,39.37 D15.A
3.3V5  (via drill 0.38)
  Top 0.178: C18.1 64.77,33.02 64.15,33.64 U11.14 | U12.3 59.4,43.81 59.31,43.73 | R24.2 67.65,45.3 67.44,45.09 U12.7 U12.8 66.3,46.73 65.15,47.88 63.88,47.88 63.63,48.13 62.23,48.13 | 59.31,43.73 59.31,47.62 59.82,48.13 62.23,48.13 | 59.31,43.73 59.18,43.6 C17.1 R23.2 57.37,40.22 57.15,40.01 57.15,38.86 56.89,38.6 J32.2 54.74,38.61 53.98,37.85 53.98,34.8 53.09,33.91 53.09,32.77 53.47,32.38 JP17.2 | J34.VCC 62.23,48.13 | 62.23,48.13 J36.2 | J35.2 | U11.17 66.93,37.45 67.18,37.71 68.2,37.71 68.68,37.22 D16.A
  Top 0.305: J31.2 67.31,30.48 67.73,30.9 C16.1 C18.1 67.73,34.73 JP18.2 69.06,34.77 69.47,35.18 D16.A 69.99,37.22 70.37,37.6 J35.2 72.53,37.6 v74.3,39.37
  Bottom 0.178: D18.A 74.3,43.81 71.12,46.99 66.04,46.99 65.15,47.88 62.61,47.88 62.23,48.26 J34.VCC
  Bottom 0.305: v74.3,39.37 D18.A
3.3V6  (via drill 0.38)
  Top 0.178: C21.1 13.97,58.42 13.35,59.04 U13.14 | U14.3 8.6,69.22 8.51,69.13 | R28.2 16.85,70.7 16.64,70.48 U14.7 U14.8 15.5,72.13 14.35,73.28 13.08,73.28 12.83,73.53 11.43,73.53 | 8.51,69.13 8.51,73.03 9.02,73.53 11.43,73.53 | 8.51,69.13 8.38,69 C20.1 R27.2 6.57,65.62 6.35,65.41 6.35,64.26 6.09,64 J38.2 3.94,64.01 3.17,63.25 3.17,60.2 2.29,59.31 2.29,58.17 2.67,57.78 JP20.2 | J40.VCC 11.43,73.53 | 11.43,73.53 J42.2 | J41.2 | U13.17 16.13,62.85 16.38,63.11 17.4,63.11 17.88,62.62 D19.A
  Top 0.305: J37.2 16.51,55.88 16.93,56.3 C19.1 C21.1 16.93,60.13 JP21.2 18.26,60.17 18.67,60.58 D19.A 19.19,62.62 19.57,63 J41.2 21.73,63 v23.5,64.77
  Bottom 0.178: D21.A 23.5,69.22 20.32,72.39 15.24,72.39 14.35,73.28 11.81,73.28 11.43,73.66 J40.VCC
  Bottom 0.305: v23.5,64.77 D21.A
3.3V7  (via drill 0.38)
  Top 0.178: C24.1 39.37,58.42 38.75,59.04 U15.14 | U16.3 34,69.22 33.91,69.13 | R32.2 42.25,70.7 42.04,70.48 U16.7 U16.8 40.9,72.13 39.75,73.28 38.48,73.28 38.23,73.53 36.83,73.53 | 33.91,69.13 33.91,73.03 34.42,73.53 36.83,73.53 | 33.91,69.13 33.78,69 C23.1 R31.2 31.96,65.62 31.75,65.41 31.75,64.26 31.49,64 J44.2 29.34,64.01 28.57,63.25 28.57,60.2 27.69,59.31 27.69,58.17 28.07,57.78 JP23.2 | J46.VCC 36.83,73.53 | 36.83,73.53 J48.2 | J47.2 | U15.17 41.53,62.85 41.78,63.11 42.8,63.11 43.28,62.62 D22.A
  Top 0.305: J43.2 41.91,55.88 42.33,56.3 C22.1 C24.1 42.33,60.13 JP24.2 43.66,60.17 44.07,60.58 D22.A 44.59,62.62 44.97,63 J47.2 47.12,63 v48.9,64.77
  Bottom 0.178: D24.A 48.9,69.22 45.72,72.39 40.64,72.39 39.75,73.28 37.21,73.28 36.83,73.66 J46.VCC
  Bottom 0.305: v48.9,64.77 D24.A
3.3V8  (via drill 0.38)
  Top 0.178: C27.1 64.77,58.42 64.15,59.04 U17.14 | U18.3 59.4,69.22 59.31,69.13 | R36.2 67.65,70.7 67.44,70.48 U18.7 U18.8 66.3,72.13 65.15,73.28 63.88,73.28 63.63,73.53 62.23,73.53 | 59.31,69.13 59.31,73.03 59.82,73.53 62.23,73.53 | 59.31,69.13 59.18,69 C26.1 R35.2 57.37,65.62 57.15,65.41 57.15,64.26 56.89,64 J50.2 54.74,64.01 53.98,63.25 53.98,60.2 53.09,59.31 53.09,58.17 53.47,57.78 JP26.2 | J52.VCC 62.23,73.53 | 62.23,73.53 J54.2 | J53.2 | U17.17 66.93,62.85 67.18,63.11 68.2,63.11 68.68,62.62 D25.A
  Top 0.305: J49.2 67.31,55.88 67.73,56.3 C25.1 C27.1 67.73,60.13 JP27.2 69.06,60.17 69.47,60.58 D25.A 69.99,62.62 70.37,63 J53.2 72.53,63 v74.3,64.77
  Bottom 0.178: D27.A 74.3,69.22 71.12,72.39 66.04,72.39 65.15,73.28 62.61,73.28 62.23,73.66 J52.VCC
  Bottom 0.305: v74.3,64.77 D27.A
!CS_EE  (via drill 0.38)
  Top 0.178: U3.1 9.9,21.72 v9.53,22.1 | U1.6 8.92,14 v8.89,13.97
  Bottom 0.178: v9.53,22.1 9.53,14.61 v8.89,13.97 8.92,14 U1.6 10.53,13.97 11.43,13.97 J5.5
!CS_EE1  (via drill 0.38)
  Top 0.178: U4.1 35.3,21.72 v34.92,22.1 | U2.6 34.32,14 v34.29,13.97
  Bottom 0.178: v34.92,22.1 34.92,14.61 v34.29,13.97 34.32,14 U2.6 35.93,13.97 36.83,13.97 J12.5
!CS_EE2  (via drill 0.38)
  Top 0.178: U6.1 60.7,21.72 v60.33,22.1 | U5.6 59.72,14 v59.69,13.97
  Bottom 0.178: v60.33,22.1 60.33,14.61 v59.69,13.97 59.72,14 U5.6 61.33,13.97 62.23,13.97 J18.5
!CS_EE3  (via drill 0.38)
  Top 0.178: U8.1 9.9,47.12 v9.53,47.5 | U7.6 8.92,39.4 v8.89,39.37
  Bottom 0.178: v9.53,47.5 9.53,40.01 v8.89,39.37 8.92,39.4 U7.6 10.53,39.37 11.43,39.37 J24.5
!CS_EE4  (via drill 0.38)
  Top 0.178: U10.1 35.3,47.12 v34.92,47.5 | U9.6 34.32,39.4 v34.29,39.37
  Bottom 0.178: v34.92,47.5 34.92,40.01 v34.29,39.37 34.32,39.4 U9.6 35.93,39.37 36.83,39.37 J30.5
!CS_EE5  (via drill 0.38)
  Top 0.178: U12.1 60.7,47.12 v60.33,47.5 | U11.6 59.72,39.4 v59.69,39.37
  Bottom 0.178: v60.33,47.5 60.33,40.01 v59.69,39.37 59.72,39.4 U11.6 61.33,39.37 62.23,39.37 J36.5
!CS_EE6  (via drill 0.38)
  Top 0.178: U14.1 9.9,72.52 v9.53,72.9 | U13.6 8.92,64.8 v8.89,64.77
  Bottom 0.178: v9.53,72.9 9.53,65.41 v8.89,64.77 8.92,64.8 U13.6 10.53,64.77 11.43,64.77 J42.5
!CS_EE7  (via drill 0.38)
  Top 0.178: U16.1 35.3,72.52 v34.92,72.9 | U15.6 34.32,64.8 v34.29,64.77
  Bottom 0.178: v34.92,72.9 34.92,65.41 v34.29,64.77 34.32,64.8 U15.6 35.93,64.77 36.83,64.77 J48.5
!CS_EE8  (via drill 0.38)
  Top 0.178: U18.1 60.7,72.52 v60.33,72.9 | U17.6 59.72,64.8 v59.69,64.77
  Bottom 0.178: v60.33,72.9 60.33,65.41 v59.69,64.77 59.72,64.8 U17.6 61.33,64.77 62.23,64.77 J54.5
!INT  (via drill 0.38)
  Top 0.178: U1.13 v12.7,5.08
  Bottom 0.178: J3.1 8.89,3.81 10.16,5.08 v12.7,5.08
!INT1  (via drill 0.38)
  Top 0.178: U2.13 v38.1,5.08
  Bottom 0.178: J9.1 34.29,3.81 35.56,5.08 v38.1,5.08
!INT2  (via drill 0.38)
  Top 0.178: U5.13 v63.5,5.08
  Bottom 0.178: J15.1 59.69,3.81 60.96,5.08 v63.5,5.08
!INT3  (via drill 0.38)
  Top 0.178: U7.13 v12.7,30.48
  Bottom 0.178: J21.1 8.89,29.21 10.16,30.48 v12.7,30.48
!INT4  (via drill 0.38)
  Top 0.178: U9.13 v38.1,30.48
  Bottom 0.178: J27.1 34.29,29.21 35.56,30.48 v38.1,30.48
!INT5  (via drill 0.38)
  Top 0.178: U11.13 v63.5,30.48
  Bottom 0.178: J33.1 59.69,29.21 60.96,30.48 v63.5,30.48
!INT6  (via drill 0.38)
  Top 0.178: U13.13 v12.7,55.88
  Bottom 0.178: J39.1 8.89,54.61 10.16,55.88 v12.7,55.88
!INT7  (via drill 0.38)
  Top 0.178: U15.13 v38.1,55.88
  Bottom 0.178: J45.1 34.29,54.61 35.56,55.88 v38.1,55.88
!INT8  (via drill 0.38)
  Top 0.178: U17.13 v63.5,55.88
  Bottom 0.178: J51.1 59.69,54.61 60.96,55.88 v63.5,55.88
!RST  (via drill 0.38)
  Top 0.178: U1.2 13.35,15.51 13.59,15.75 14.86,15.75 v15.24,16.13 15.62,16.51 17.14,16.51 17.78,17.14 R4.1
  Bottom 0.178: v15.24,16.13 14.86,16.13 8.89,10.16 8.89,7.62 6.35,5.08 J3.2
!RST1  (via drill 0.38)
  Top 0.178: U2.2 38.75,15.51 38.99,15.75 40.26,15.75 v40.64,16.13 41.02,16.51 42.55,16.51 43.18,17.14 R6.1
  Bottom 0.178: v40.64,16.13 40.26,16.13 34.29,10.16 34.29,7.62 31.75,5.08 J9.2
!RST2  (via drill 0.38)
  Top 0.178: U5.2 64.15,15.51 64.39,15.75 65.66,15.75 v66.04,16.13 66.42,16.51 67.94,16.51 68.58,17.14 R10.1
  Bottom 0.178: v66.04,16.13 65.66,16.13 59.69,10.16 59.69,7.62 57.15,5.08 J15.2
!RST3  (via drill 0.38)
  Top 0.178: U7.2 13.35,40.91 13.59,41.15 14.86,41.15 v15.24,41.53 15.62,41.91 17.14,41.91 17.78,42.55 R16.1
  Bottom 0.178: v15.24,41.53 14.86,41.53 8.89,35.56 8.89,33.02 6.35,30.48 J21.2
!RST4  (via drill 0.38)
  Top 0.178: U9.2 38.75,40.91 38.99,41.15 40.26,41.15 v40.64,41.53 41.02,41.91 42.55,41.91 43.18,42.55 R20.1
  Bottom 0.178: v40.64,41.53 40.26,41.53 34.29,35.56 34.29,33.02 31.75,30.48 J27.2
!RST5  (via drill 0.38)
  Top 0.178: U11.2 64.15,40.91 64.39,41.15 65.66,41.15 v66.04,41.53 66.42,41.91 67.94,41.91 68.58,42.55 R24.1
  Bottom 0.178: v66.04,41.53 65.66,41.53 59.69,35.56 59.69,33.02 57.15,30.48 J33.2
!RST6  (via drill 0.38)
  Top 0.178: U13.2 13.35,66.31 13.59,66.55 14.86,66.55 v15.24,66.93 15.62,67.31 17.14,67.31 17.78,67.94 R28.1
  Bottom 0.178: v15.24,66.93 14.86,66.93 8.89,60.96 8.89,58.42 6.35,55.88 J39.2
!RST7  (via drill 0.38)
  Top 0.178: U15.2 38.75,66.31 38.99,66.55 40.26,66.55 v40.64,66.93 41.02,67.31 42.55,67.31 43.18,67.94 R32.1
  Bottom 0.178: v40.64,66.93 40.26,66.93 34.29,60.96 34.29,58.42 31.75,55.88 J45.2
!RST8  (via drill 0.38)
  Top 0.178: U17.2 64.15,66.31 64.39,66.55 65.66,66.55 v66.04,66.93 66.42,67.31 67.94,67.31 68.58,67.94 R36.1
  Bottom 0.178: v66.04,66.93 65.66,66.93 59.69,60.96 59.69,58.42 57.15,55.88 J51.2
GND  (via drill 0.38)
  other vias: 15.49,10.41 8.89,15.88 1.27,12.7 24.13,12.7 21.59,10.16 17.78,5.08
  pour Top (isolate 0.178): 0,0 25.4,0 25.4,25.4 0,25.4
  pour Bottom (isolate 0.178): 0,25.4 25.4,25.4 25.4,0 0,0
GND1  (via drill 0.38)
  other vias: 40.89,10.41 34.29,15.88 26.67,12.7 49.53,12.7 46.99,10.16 43.18,5.08
  pour Top (isolate 0.178): 25.4,0 50.8,0 50.8,25.4 25.4,25.4
  pour Bottom (isolate 0.178): 25.4,25.4 50.8,25.4 50.8,0 25.4,0
GND2  (via drill 0.38)
  other vias: 66.29,10.41 59.69,15.88 52.07,12.7 74.93,12.7 72.39,10.16 68.58,5.08
  pour Top (isolate 0.178): 50.8,0 76.2,0 76.2,25.4 50.8,25.4
  pour Bottom (isolate 0.178): 50.8,25.4 76.2,25.4 76.2,0 50.8,0
GND3  (via drill 0.38)
  other vias: 15.49,35.81 8.89,41.27 1.27,38.1 24.13,38.1 21.59,35.56 17.78,30.48
  pour Top (isolate 0.178): 0,25.4 25.4,25.4 25.4,50.8 0,50.8
  pour Bottom (isolate 0.178): 0,50.8 25.4,50.8 25.4,25.4 0,25.4
GND4  (via drill 0.38)
  other vias: 40.89,35.81 34.29,41.27 26.67,38.1 49.53,38.1 46.99,35.56 43.18,30.48
  pour Top (isolate 0.178): 25.4,25.4 50.8,25.4 50.8,50.8 25.4,50.8
  pour Bottom (isolate 0.178): 25.4,50.8 50.8,50.8 50.8,25.4 25.4,25.4
GND5  (via drill 0.38)
  other vias: 66.29,35.81 59.69,41.27 52.07,38.1 74.93,38.1 72.39,35.56 68.58,30.48
  pour Top (isolate 0.178): 50.8,25.4 76.2,25.4 76.2,50.8 50.8,50.8
  pour Bottom (isolate 0.178): 50.8,50.8 76.2,50.8 76.2,25.4 50.8,25.4
GND6  (via drill 0.38)
  other vias: 15.49,61.21 8.89,66.67 1.27,63.5 24.13,63.5 21.59,60.96 17.78,55.88
  pour Top (isolate 0.178): 0,50.8 25.4,50.8 25.4,76.2 0,76.2
  pour Bottom (isolate 0.178): 0,76.2 25.4,76.2 25.4,50.8 0,50.8
GND7  (via drill 0.38)
  other vias: 40.89,61.21 34.29,66.67 26.67,63.5 49.53,63.5 46.99,60.96 43.18,55.88
  pour Top (isolate 0.178): 25.4,50.8 50.8,50.8 50.8,76.2 25.4,76.2
  pour Bottom (isolate 0.178): 25.4,76.2 50.8,76.2 50.8,50.8 25.4,50.8
GND8  (via drill 0.38)
  other vias: 66.29,61.21 59.69,66.67 52.07,63.5 74.93,63.5 72.39,60.96 68.58,55.88
  pour Top (isolate 0.178): 50.8,50.8 76.2,50.8 76.2,76.2 50.8,76.2
  pour Bottom (isolate 0.178): 50.8,76.2 76.2,76.2 76.2,50.8 50.8,50.8
LED_DRV  (via drill 0.38)
  Top 0.305: U1.15 14,9.62 v14.35,9.27 | D2.C 16.89,15.37 v16.76,15.49
  Bottom 0.305: v14.35,9.27 16.26,9.27 16.76,9.78 v16.76,15.49 16.76,16.51 17.53,17.27 D4.K
LED_DRV1  (via drill 0.38)
  Top 0.305: U2.15 39.4,9.62 v39.75,9.27 | D5.C 42.29,15.37 v42.16,15.49
  Bottom 0.305: v39.75,9.27 41.66,9.27 42.16,9.78 v42.16,15.49 42.16,16.51 42.93,17.27 D6.K
LED_DRV2  (via drill 0.38)
  Top 0.305: U5.15 64.8,9.62 v65.15,9.27 | D8.C 67.69,15.37 v67.56,15.49
  Bottom 0.305: v65.15,9.27 67.06,9.27 67.56,9.78 v67.56,15.49 67.56,16.51 68.33,17.27 D9.K
LED_DRV3  (via drill 0.38)
  Top 0.305: U7.15 14,35.02 v14.35,34.67 | D11.C 16.89,40.77 v16.76,40.89
  Bottom 0.305: v14.35,34.67 16.26,34.67 16.76,35.18 v16.76,40.89 16.76,41.91 17.53,42.67 D12.K
LED_DRV4  (via drill 0.38)
  Top 0.305: U9.15 39.4,35.02 v39.75,34.67 | D14.C 42.29,40.77 v42.16,40.89
  Bottom 0.305: v39.75,34.67 41.66,34.67 42.16,35.18 v42.16,40.89 42.16,41.91 42.93,42.67 D15.K
LED_DRV5  (via drill 0.38)
  Top 0.305: U11.15 64.8,35.02 v65.15,34.67 | D17.C 67.69,40.77 v67.56,40.89
  Bottom 0.305: v65.15,34.67 67.06,34.67 67.56,35.18 v67.56,40.89 67.56,41.91 68.33,42.67 D18.K
LED_DRV6  (via drill 0.38)
  Top 0.305: U13.15 14,60.42 v14.35,60.07 | D20.C 16.89,66.17 v16.76,66.29
  Bottom 0.305: v14.35,60.07 16.26,60.07 16.76,60.58 v16.76,66.29 16.76,67.31 17.53,68.07 D21.K
LED_DRV7  (via drill 0.38)
  Top 0.305: U15.15 39.4,60.42 v39.75,60.07 | D23.C 42.29,66.17 v42.16,66.29
  Bottom 0.305: v39.75,60.07 41.66,60.07 42.16,60.58 v42.16,66.29 42.16,67.31 42.93,68.07 D24.K
LED_DRV8  (via drill 0.38)
  Top 0.305: U17.15 64.8,60.42 v65.15,60.07 | D26.C 67.69,66.17 v67.56,66.29
  Bottom 0.305: v65.15,60.07 67.06,60.07 67.56,60.58 v67.56,66.29 67.56,67.31 68.33,68.07 D27.K
MISO
  Top 0.178: 12.19,20.32 12.19,16.26 11.4,15.46 U1.5 | U3.2 9.9,20.19 10.03,20.32 12.19,20.32 | 12.19,20.32 12.7,20.32 J5.1
MISO1
  Top 0.178: 37.59,20.32 37.59,16.26 36.8,15.46 U2.5 | U4.2 35.3,20.19 35.43,20.32 37.59,20.32 | 37.59,20.32 38.1,20.32 J12.1
MISO2
  Top 0.178: 62.99,20.32 62.99,16.26 62.2,15.46 U5.5 | U6.2 60.7,20.19 60.83,20.32 62.99,20.32 | 62.99,20.32 63.5,20.32 J18.1
MISO3
  Top 0.178: 12.19,45.72 12.19,41.66 11.4,40.86 U7.5 | U8.2 9.9,45.59 10.03,45.72 12.19,45.72 | 12.19,45.72 12.7,45.72 J24.1
MISO4
  Top 0.178: 37.59,45.72 37.59,41.66 36.8,40.86 U9.5 | U10.2 35.3,45.59 35.43,45.72 37.59,45.72 | 37.59,45.72 38.1,45.72 J30.1
MISO5
  Top 0.178: 62.99,45.72 62.99,41.66 62.2,40.86 U11.5 | U12.2 60.7,45.59 60.83,45.72 62.99,45.72 | 62.99,45.72 63.5,45.72 J36.1
MISO6
  Top 0.178: 12.19,71.12 12.19,67.06 11.4,66.26 U13.5 | U14.2 9.9,70.99 10.03,71.12 12.19,71.12 | 12.19,71.12 12.7,71.12 J42.1
MISO7
  Top 0.178: 37.59,71.12 37.59,67.06 36.8,66.26 U15.5 | U16.2 35.3,70.99 35.43,71.12 37.59,71.12 | 37.59,71.12 38.1,71.12 J48.1
MISO8
  Top 0.178: 62.99,71.12 62.99,67.06 62.2,66.26 U17.5 | U18.2 60.7,70.99 60.83,71.12 62.99,71.12 | 62.99,71.12 63.5,71.12 J54.1
MOSI  (via drill 0.38)
  Top 0.178: U1.4 12.05,15.48 12.57,16 12.57,19.3 v13.08,19.81 | U3.5 16.26,17.14 16.64,17.53 v16.64,19.05
  Bottom 0.178: v13.08,19.81 12.19,19.81 J5.4 12.7,17.78 15.37,17.78 v16.64,19.05
MOSI1  (via drill 0.38)
  Top 0.178: U2.4 37.45,15.48 37.97,16 37.97,19.3 v38.48,19.81 | U4.5 41.66,17.14 42.04,17.53 v42.04,19.05
  Bottom 0.178: v38.48,19.81 37.59,19.81 J12.4 38.1,17.78 40.77,17.78 v42.04,19.05
MOSI2  (via drill 0.38)
  Top 0.178: U5.4 62.85,15.48 63.37,16 63.37,19.3 v63.88,19.81 | U6.5 67.06,17.14 67.44,17.53 v67.44,19.05
  Bottom 0.178: v63.88,19.81 62.99,19.81 J18.4 63.5,17.78 66.17,17.78 v67.44,19.05
MOSI3  (via drill 0.38)
  Top 0.178: U7.4 12.05,40.88 12.57,41.4 12.57,44.7 v13.08,45.21 | U8.5 16.26,42.55 16.64,42.93 v16.64,44.45
  Bottom 0.178: v13.08,45.21 12.19,45.21 J24.4 12.7,43.18 15.37,43.18 v16.64,44.45
MOSI4  (via drill 0.38)
  Top 0.178: U9.4 37.45,40.88 37.97,41.4 37.97,44.7 v38.48,45.21 | U10.5 41.66,42.55 42.04,42.93 v42.04,44.45
  Bottom 0.178: v38.48,45.21 37.59,45.21 J30.4 38.1,43.18 40.77,43.18 v42.04,44.45
MOSI5  (via drill 0.38)
  Top 0.178: U11.4 62.85,40.88 63.37,41.4 63.37,44.7 v63.88,45.21 | U12.5 67.06,42.55 67.44,42.93 v67.44,44.45
  Bottom 0.178: v63.88,45.21 62.99,45.21 J36.4 63.5,43.18 66.17,43.18 v67.44,44.45
MOSI6  (via drill 0.38)
  Top 0.178: U13.4 12.05,66.28 12.57,66.8 12.57,70.1 v13.08,70.61 | U14.5 16.26,67.94 16.64,68.33 v16.64,69.85
  Bottom 0.178: v13.08,70.61 12.19,70.61 J42.4 12.7,68.58 15.37,68.58 v16.64,69.85
MOSI7  (via drill 0.38)
  Top 0.178: U15.4 37.45,66.28 37.97,66.8 37.97,70.1 v38.48,70.61 | U16.5 41.66,67.94 42.04,68.33 v42.04,69.85
  Bottom 0.178: v38.48,70.61 37.59,70.61 J48.4 38.1,68.58 40.77,68.58 v42.04,69.85
MOSI8  (via drill 0.38)
  Top 0.178: U17.4 62.85,66.28 63.37,66.8 63.37,70.1 v63.88,70.61 | U18.5 67.06,67.94 67.44,68.33 v67.44,69.85
  Bottom 0.178: v63.88,70.61 62.99,70.61 J54.4 63.5,68.58 66.17,68.58 v67.44,69.85
N$1  (via drill 0.38)
  Top 0.178: U1.8 8.89,12.7 8.47,13.12 R3.1 v7.62,11.94
  Bottom 0.178: v7.62,11.94 JP2.2
N$2
  Top 0.178: U1.18 15.62,12.7 15.88,12.95 15.88,15.62 16.38,16.13 18.29,16.13 18.67,15.75 D1.C
N$3
  Top 0.178: R1.2 30.48,7.62 30.3,7.8 JP5.3
N$4
  Top 0.178: R13.2 5.08,7.62 4.9,7.8 JP1.3
N$5
  Top 0.178: R14.2 5.08,6.35 4.9,6.17 JP1.1
N$6
  Top 0.305: JP4.1 D2.A
N$7
  Top 0.178: R2.2 30.48,6.35 30.3,6.17 JP5.1
N$8  (via drill 0.38)
  Top 0.178: U2.8 34.29,12.7 33.87,13.12 R5.1 v33.02,11.94
  Bottom 0.178: v33.02,11.94 JP3.2
N$9
  Top 0.178: U2.18 41.02,12.7 41.27,12.95 41.27,15.62 41.78,16.13 43.69,16.13 44.07,15.75 D3.C
N$10
  Top 0.305: JP6.1 D5.A
N$11
  Top 0.178: R7.2 55.88,7.62 55.7,7.8 JP8.3
N$12
  Top 0.178: R8.2 55.88,6.35 55.7,6.17 JP8.1
N$13  (via drill 0.38)
  Top 0.178: U5.8 59.69,12.7 59.27,13.12 R9.1 v58.42,11.94
  Bottom 0.178: v58.42,11.94 JP7.2
N$14
  Top 0.178: U5.18 66.42,12.7 66.67,12.95 66.67,15.62 67.18,16.13 69.09,16.13 69.47,15.75 D7.C
N$15
  Top 0.305: JP9.1 D8.A
N$16
  Top 0.178: R11.2 5.08,33.02 4.9,33.2 JP11.3
N$17
  Top 0.178: R12.2 5.08,31.75 4.9,31.57 JP11.1
N$18  (via drill 0.38)
  Top 0.178: U7.8 8.89,38.1 8.47,38.52 R15.1 v7.62,37.34
  Bottom 0.178: v7.62,37.34 JP10.2
N$19
  Top 0.178: U7.18 15.62,38.1 15.88,38.35 15.88,41.02 16.38,41.53 18.29,41.53 18.67,41.15 D10.C
N$20
  Top 0.305: JP12.1 D11.A
N$21
  Top 0.178: R17.2 30.48,33.02 30.3,33.2 JP14.3
N$22
  Top 0.178: R18.2 30.48,31.75 30.3,31.57 JP14.1
N$23  (via drill 0.38)
  Top 0.178: U9.8 34.29,38.1 33.87,38.52 R19.1 v33.02,37.34
  Bottom 0.178: v33.02,37.34 JP13.2
N$24
  Top 0.178: U9.18 41.02,38.1 41.27,38.35 41.27,41.02 41.78,41.53 43.69,41.53 44.07,41.15 D13.C
N$25
  Top 0.305: JP15.1 D14.A
N$26
  Top 0.178: R21.2 55.88,33.02 55.7,33.2 JP17.3
N$27
  Top 0.178: R22.2 55.88,31.75 55.7,31.57 JP17.1
N$28  (via drill 0.38)
  Top 0.178: U11.8 59.69,38.1 59.27,38.52 R23.1 v58.42,37.34
  Bottom 0.178: v58.42,37.34 JP16.2
N$29
  Top 0.178: U11.18 66.42,38.1 66.67,38.35 66.67,41.02 67.18,41.53 69.09,41.53 69.47,41.15 D16.C
N$30
  Top 0.305: JP18.1 D17.A
N$31
  Top 0.178: R25.2 5.08,58.42 4.9,58.6 JP20.3
N$32
  Top 0.178: R26.2 5.08,57.15 4.9,56.97 JP20.1
N$33  (via drill 0.38)
  Top 0.178: U13.8 8.89,63.5 8.47,63.92 R27.1 v7.62,62.74
  Bottom 0.178: v7.62,62.74 JP19.2
N$34
  Top 0.178: U13.18 15.62,63.5 15.88,63.75 15.88,66.42 16.38,66.93 18.29,66.93 18.67,66.55 D19.C
N$35
  Top 0.305: JP21.1 D20.A
N$36
  Top 0.178: R29.2 30.48,58.42 30.3,58.6 JP23.3
N$37
  Top 0.178: R30.2 30.48,57.15 30.3,56.97 JP23.1
N$38  (via drill 0.38)
  Top 0.178: U15.8 34.29,63.5 33.87,63.92 R31.1 v33.02,62.74
  Bottom 0.178: v33.02,62.74 JP22.2
N$39
  Top 0.178: U15.18 41.02,63.5 41.27,63.75 41.27,66.42 41.78,66.93 43.69,66.93 44.07,66.55 D22.C
N$40
  Top 0.305: JP24.1 D23.A
N$41
  Top 0.178: R33.2 55.88,58.42 55.7,58.6 JP26.3
N$42
  Top 0.178: R34.2 55.88,57.15 55.7,56.97 JP26.1
N$43  (via drill 0.38)
  Top 0.178: U17.8 59.69,63.5 59.27,63.92 R35.1 v58.42,62.74
  Bottom 0.178: v58.42,62.74 JP25.2
N$44
  Top 0.178: U17.18 66.42,63.5 66.67,63.75 66.67,66.42 67.18,66.93 69.09,66.93 69.47,66.55 D25.C
N$45
  Top 0.305: JP27.1 D26.A
RX/SCL  (via drill 0.38)
  Top 0.178: J4.4 v20.32,15.24 19.05,16.51 19.05,20.7 18.16,21.59 16.13,21.59 14.86,22.86 14.22,22.86 13.97,23.11 J2.TXO | J1.4 6.58,11.2 7.62,10.16 7.62,6.48 7.75,6.35 R14.1 v11.3,6.35 11.43,6.22 J8.4 | U1.11 11.4,8.99 v11.3,8.89
  Bottom 0.178: 11.3,7.62 19.05,7.62 20.32,8.89 v20.32,15.24 | J8.4 11.43,2.54 | v11.3,6.35 11.3,7.62 | 11.3,7.62 v11.3,8.89
RX/SCL1  (via drill 0.38)
  Top 0.178: J11.4 v45.72,15.24 44.45,16.51 44.45,20.7 43.56,21.59 41.53,21.59 40.26,22.86 39.62,22.86 39.37,23.11 J10.TXO | J7.4 31.98,11.2 33.02,10.16 33.02,6.48 33.15,6.35 R2.1 v36.7,6.35 36.83,6.22 J6.4 | U2.11 36.8,8.99 v36.7,8.89
  Bottom 0.178: 36.7,7.62 44.45,7.62 45.72,8.89 v45.72,15.24 | J6.4 36.83,2.54 | v36.7,6.35 36.7,7.62 | 36.7,7.62 v36.7,8.89
RX/SCL2  (via drill 0.38)
  Top 0.178: J17.4 v71.12,15.24 69.85,16.51 69.85,20.7 68.96,21.59 66.93,21.59 65.66,22.86 65.02,22.86 64.77,23.11 J16.TXO | J14.4 57.38,11.2 58.42,10.16 58.42,6.48 58.55,6.35 R8.1 v62.1,6.35 62.23,6.22 J13.4 | U5.11 62.2,8.99 v62.1,8.89
  Bottom 0.178: 62.1,7.62 69.85,7.62 71.12,8.89 v71.12,15.24 | J13.4 62.23,2.54 | v62.1,6.35 62.1,7.62 | 62.1,7.62 v62.1,8.89
RX/SCL3  (via drill 0.38)
  Top 0.178: J23.4 v20.32,40.64 19.05,41.91 19.05,46.1 18.16,46.99 16.13,46.99 14.86,48.26 14.22,48.26 13.97,48.51 J22.TXO | J20.4 6.58,36.6 7.62,35.56 7.62,31.88 7.75,31.75 R12.1 v11.3,31.75 11.43,31.62 J19.4 | U7.11 11.4,34.39 v11.3,34.29
  Bottom 0.178: 11.3,33.02 19.05,33.02 20.32,34.29 v20.32,40.64 | J19.4 11.43,27.94 | v11.3,31.75 11.3,33.02 | 11.3,33.02 v11.3,34.29
RX/SCL4  (via drill 0.38)
  Top 0.178: J29.4 v45.72,40.64 44.45,41.91 44.45,46.1 43.56,46.99 41.53,46.99 40.26,48.26 39.62,48.26 39.37,48.51 J28.TXO | J26.4 31.98,36.6 33.02,35.56 33.02,31.88 33.15,31.75 R18.1 v36.7,31.75 36.83,31.62 J25.4 | U9.11 36.8,34.39 v36.7,34.29
  Bottom 0.178: 36.7,33.02 44.45,33.02 45.72,34.29 v45.72,40.64 | J25.4 36.83,27.94 | v36.7,31.75 36.7,33.02 | 36.7,33.02 v36.7,34.29
RX/SCL5  (via drill 0.38)
  Top 0.178: J35.4 v71.12,40.64 69.85,41.91 69.85,46.1 68.96,46.99 66.93,46.99 65.66,48.26 65.02,48.26 64.77,48.51 J34.TXO | J32.4 57.38,36.6 58.42,35.56 58.42,31.88 58.55,31.75 R22.1 v62.1,31.75 62.23,31.62 J31.4 | U11.11 62.2,34.39 v62.1,34.29
  Bottom 0.178: 62.1,33.02 69.85,33.02 71.12,34.29 v71.12,40.64 | J31.4 62.23,27.94 | v62.1,31.75 62.1,33.02 | 62.1,33.02 v62.1,34.29
RX/SCL6  (via drill 0.38)
  Top 0.178: J41.4 v20.32,66.04 19.05,67.31 19.05,71.5 18.16,72.39 16.13,72.39 14.86,73.66 14.22,73.66 13.97,73.91 J40.TXO | J38.4 6.58,62 7.62,60.96 7.62,57.28 7.75,57.15 R26.1 v11.3,57.15 11.43,57.02 J37.4 | U13.11 11.4,59.79 v11.3,59.69
  Bottom 0.178: 11.3,58.42 19.05,58.42 20.32,59.69 v20.32,66.04 | J37.4 11.43,53.34 | v11.3,57.15 11.3,58.42 | 11.3,58.42 v11.3,59.69
RX/SCL7  (via drill 0.38)
  Top 0.178: J47.4 v45.72,66.04 44.45,67.31 44.45,71.5 43.56,72.39 41.53,72.39 40.26,73.66 39.62,73.66 39.37,73.91 J46.TXO | J44.4 31.98,62 33.02,60.96 33.02,57.28 33.15,57.15 R30.1 v36.7,57.15 36.83,57.02 J43.4 | U15.11 36.8,59.79 v36.7,59.69
  Bottom 0.178: 36.7,58.42 44.45,58.42 45.72,59.69 v45.72,66.04 | J43.4 36.83,53.34 | v36.7,57.15 36.7,58.42 | 36.7,58.42 v36.7,59.69
RX/SCL8  (via drill 0.38)
  Top 0.178: J53.4 v71.12,66.04 69.85,67.31 69.85,71.5 68.96,72.39 66.93,72.39 65.66,73.66 65.02,73.66 64.77,73.91 J52.TXO | J50.4 57.38,62 58.42,60.96 58.42,57.28 58.55,57.15 R34.1 v62.1,57.15 62.23,57.02 J49.4 | U17.11 62.2,59.79 v62.1,59.69
  Bottom 0.178: 62.1,58.42 69.85,58.42 71.12,59.69 v71.12,66.04 | J49.4 62.23,53.34 | v62.1,57.15 62.1,58.42 | 62.1,58.42 v62.1,59.69
SCK
  Top 0.178: U1.3 12.7,15.62 12.95,15.88 12.95,18.03 J5.3 15.24,19.05 15.5,18.79 U3.6
SCK1
  Top 0.178: U2.3 38.1,15.62 38.35,15.88 38.35,18.03 J12.3 40.64,19.05 40.9,18.79 U4.6
SCK2
  Top 0.178: U5.3 63.5,15.62 63.75,15.88 63.75,18.03 J18.3 66.04,19.05 66.3,18.79 U6.6
SCK3
  Top 0.178: U7.3 12.7,41.02 12.95,41.27 12.95,43.43 J24.3 15.24,44.45 15.5,44.19 U8.6
SCK4
  Top 0.178: U9.3 38.1,41.02 38.35,41.27 38.35,43.43 J30.3 40.64,44.45 40.9,44.19 U10.6
SCK5
  Top 0.178: U11.3 63.5,41.02 63.75,41.27 63.75,43.43 J36.3 66.04,44.45 66.3,44.19 U12.6
SCK6
  Top 0.178: U13.3 12.7,66.42 12.95,66.67 12.95,68.83 J42.3 15.24,69.85 15.5,69.59 U14.6
SCK7
  Top 0.178: U15.3 38.1,66.42 38.35,66.67 38.35,68.83 J48.3 40.64,69.85 40.9,69.59 U16.6
SCK8
  Top 0.178: U17.3 63.5,66.42 63.75,66.67 63.75,68.83 J54.3 66.04,69.85 66.3,69.59 U18.6
TX/SDA  (via drill 0.38)
  Top 0.178: U1.12 12.05,7.62 | 12.05,7.62 12.05,4.46 13.97,2.54 J8.3 | J2.RXI 16.51,22.99 17.27,22.23 19.68,22.23 22.23,19.68 v22.23,18.41 22.23,13.97 21.46,13.21 J4.3 | 12.05,7.62 R13.1 8.47,9.95 6.21,12.2 J1.3
  Bottom 0.178: J8.3 13.97,2.54 15.24,3.81 18.8,3.81 20.95,5.97 20.95,14.1 22.23,15.37 v22.23,18.41
TX/SDA1  (via drill 0.38)
  Top 0.178: U2.12 37.45,7.62 | 37.45,7.62 37.45,4.46 39.37,2.54 J6.3 | J10.RXI 41.91,22.99 42.67,22.23 45.09,22.23 47.62,19.68 v47.62,18.41 47.62,13.97 46.86,13.21 J11.3 | 37.45,7.62 R1.1 33.87,9.95 31.61,12.2 J7.3
  Bottom 0.178: J6.3 39.37,2.54 40.64,3.81 44.2,3.81 46.35,5.97 46.35,14.1 47.62,15.37 v47.62,18.41
TX/SDA2  (via drill 0.38)
  Top 0.178: U5.12 62.85,7.62 | 62.85,7.62 62.85,4.46 64.77,2.54 J13.3 | J16.RXI 67.31,22.99 68.07,22.23 70.48,22.23 73.03,19.68 v73.03,18.41 73.03,13.97 72.26,13.21 J17.3 | 62.85,7.62 R7.1 59.27,9.95 57.02,12.2 J14.3
  Bottom 0.178: J13.3 64.77,2.54 66.04,3.81 69.6,3.81 71.75,5.97 71.75,14.1 73.03,15.37 v73.03,18.41
TX/SDA3  (via drill 0.38)
  Top 0.178: U7.12 12.05,33.02 | 12.05,33.02 12.05,29.86 13.97,27.94 J19.3 | J22.RXI 16.51,48.39 17.27,47.62 19.68,47.62 22.23,45.09 v22.23,43.81 22.23,39.37 21.46,38.61 J23.3 | 12.05,33.02 R11.1 8.47,35.34 6.21,37.6 J20.3
  Bottom 0.178: J19.3 13.97,27.94 15.24,29.21 18.8,29.21 20.95,31.37 20.95,39.5 22.23,40.77 v22.23,43.81
TX/SDA4  (via drill 0.38)
  Top 0.178: U9.12 37.45,33.02 | 37.45,33.02 37.45,29.86 39.37,27.94 J25.3 | J28.RXI 41.91,48.39 42.67,47.62 45.09,47.62 47.62,45.09 v47.62,43.81 47.62,39.37 46.86,38.61 J29.3 | 37.45,33.02 R17.1 33.87,35.34 31.61,37.6 J26.3
  Bottom 0.178: J25.3 39.37,27.94 40.64,29.21 44.2,29.21 46.35,31.37 46.35,39.5 47.62,40.77 v47.62,43.81
TX/SDA5  (via drill 0.38)
  Top 0.178: U11.12 62.85,33.02 | 62.85,33.02 62.85,29.86 64.77,27.94 J31.3 | J34.RXI 67.31,48.39 68.07,47.62 70.48,47.62 73.03,45.09 v73.03,43.81 73.03,39.37 72.26,38.61 J35.3 | 62.85,33.02 R21.1 59.27,35.34 57.02,37.6 J32.3
  Bottom 0.178: J31.3 64.77,27.94 66.04,29.21 69.6,29.21 71.75,31.37 71.75,39.5 73.03,40.77 v73.03,43.81
TX/SDA6  (via drill 0.38)
  Top 0.178: U13.12 12.05,58.42 | 12.05,58.42 12.05,55.26 13.97,53.34 J37.3 | J40.RXI 16.51,73.79 17.27,73.03 19.68,73.03 22.23,70.48 v22.23,69.22 22.23,64.77 21.46,64.01 J41.3 | 12.05,58.42 R25.1 8.47,60.74 6.21,63 J38.3
  Bottom 0.178: J37.3 13.97,53.34 15.24,54.61 18.8,54.61 20.95,56.77 20.95,64.9 22.23,66.17 v22.23,69.22
TX/SDA7  (via drill 0.38)
  Top 0.178: U15.12 37.45,58.42 | 37.45,58.42 37.45,55.26 39.37,53.34 J43.3 | J46.RXI 41.91,73.79 42.67,73.03 45.09,73.03 47.62,70.48 v47.62,69.22 47.62,64.77 46.86,64.01 J47.3 | 37.45,58.42 R29.1 33.87,60.74 31.61,63 J44.3
  Bottom 0.178: J43.3 39.37,53.34 40.64,54.61 44.2,54.61 46.35,56.77 46.35,64.9 47.62,66.17 v47.62,69.22
TX/SDA8  (via drill 0.38)
  Top 0.178: U17.12 62.85,58.42 | 62.85,58.42 62.85,55.26 64.77,53.34 J49.3 | J52.RXI 67.31,73.79 68.07,73.03 70.48,73.03 73.03,70.48 v73.03,69.22 73.03,64.77 72.26,64.01 J53.3 | 62.85,58.42 R33.1 59.27,60.74 57.02,63 J50.3
  Bottom 0.178: J49.3 64.77,53.34 66.04,54.61 69.6,54.61 71.75,56.77 71.75,64.9 73.03,66.17 v73.03,69.22